# EAGLE board BPM7004 RetroCade Synth MegaWing-alt2 (EAGLE 5.11)
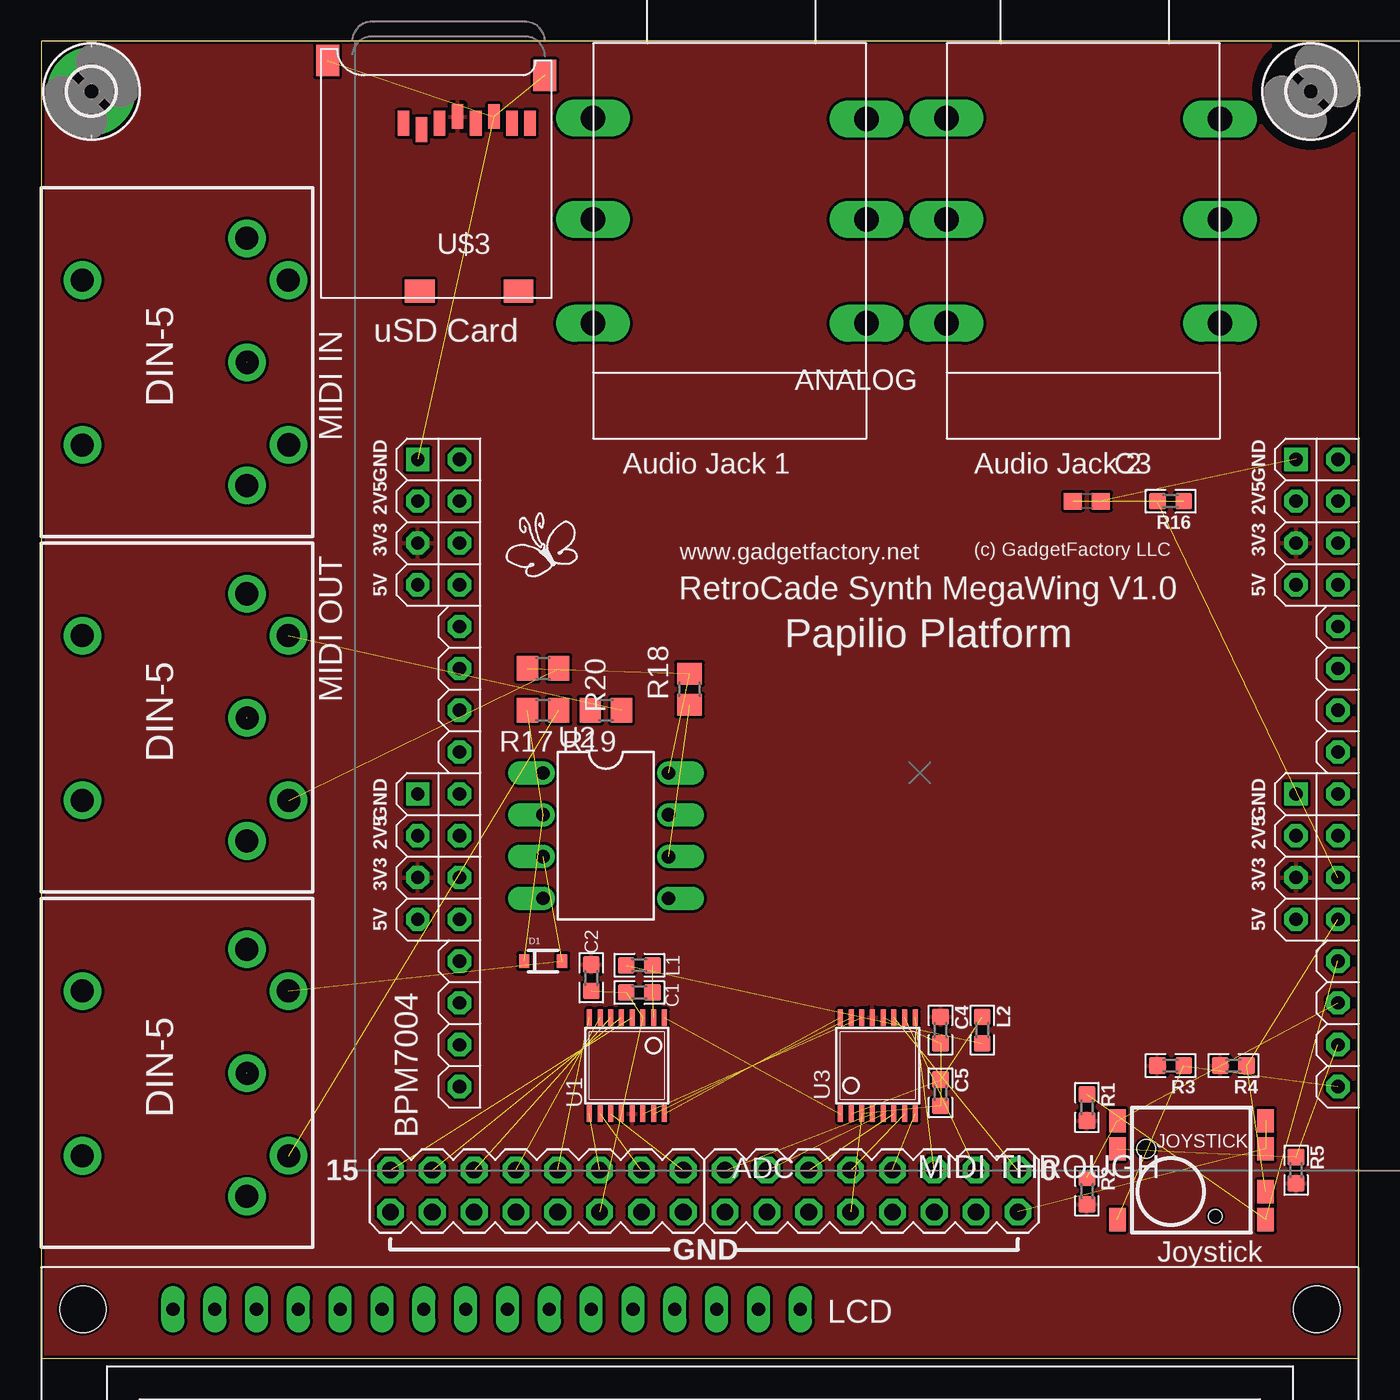
[diagram p0: board, top side]
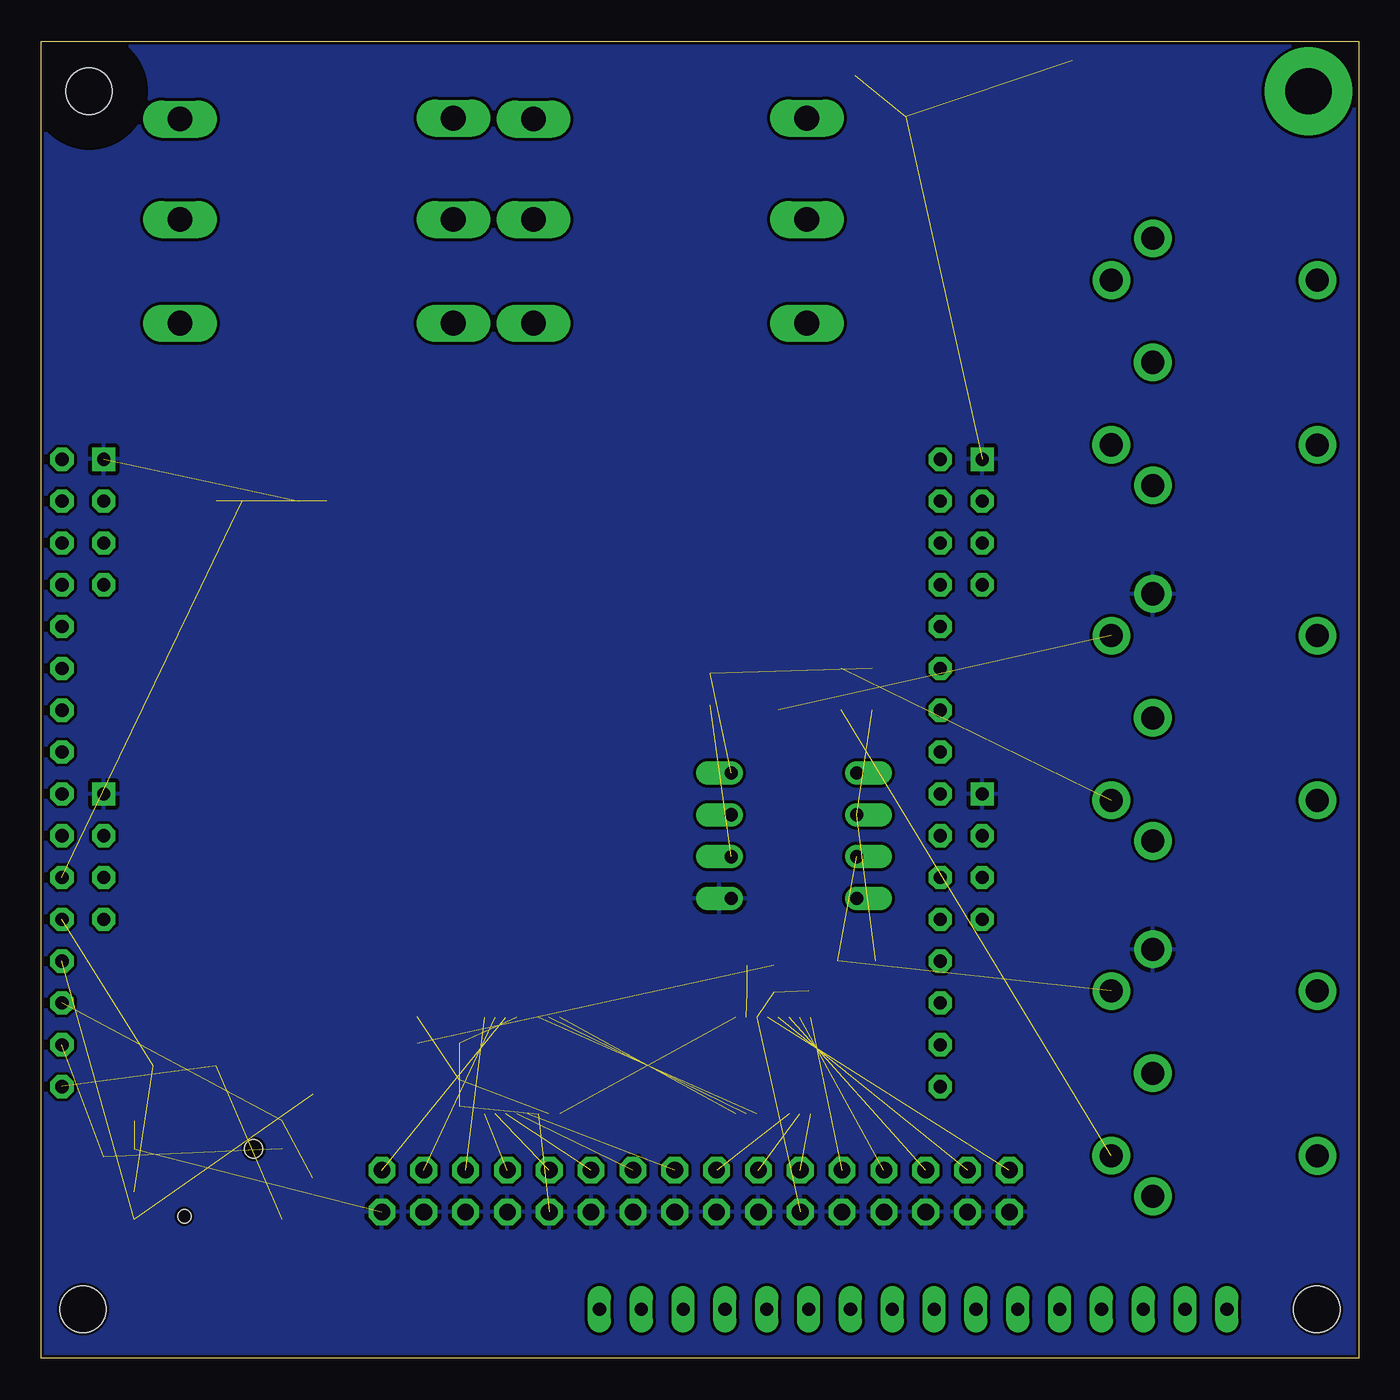
[diagram p1: board, bottom side, seen from below]

Size 80 x 80.01 mm. Coordinates in mm from the lower left corner, seen from the top.
Outline: 0,80.01 0,0 80,0 80,80.01 0,80.01
Copper layers (1*16): Top 0.035mm / dielectric 1.5mm / Bottom 0.035mm
Design rules "SparkFun_Derived_GoldePheonix_7mil *": minimum track width 7mil, minimum drill 15mil, track to track 7mil, track to pad 7mil, pad to pad 7mil, via to via 7mil, smd to smd 7mil, copper to edge 7mil, drill to drill 7mil, minimum pad ring 12mil, minimum via ring 10mil, stop-mask expansion 4mil, vias tented up to drill 18mil, thermal gap 10mil

## Footprints (pad centres in the part's own frame; a part is rotated, then mirrored left to right if it is on the bottom)
MA08-2 = drill 1.016 octagon: 1 -8.89,-1.27; 2 -8.89,1.27; 3 -6.35,-1.27; 4 -6.35,1.27; 5 -3.81,-1.27; 6 -3.81,1.27; 7 -1.27,-1.27; 8 -1.27,1.27; 9 1.27,-1.27; 10 1.27,1.27; 11 3.81,-1.27; 12 3.81,1.27; 13 6.35,-1.27; 14 6.35,1.27; 15 8.89,-1.27; 16 8.89,1.27
0603 = smd 1 x 1: 1 -0.8,0; 2 0.8,0
C0603 = smd 1.1 x 1: 1 -0.85,0; 2 0.85,0
SOD-323 = smd 0.63 x 0.83: 1 -1.15,0; 2 1.15,0
2,8-PAD = drill 2.8 pad 5.334 round: B2,8 0,0
2,8 = hole 2.8: 0,0
TPA-5POS = smd 1 x 1.4: 1 -4.5,-3; 2 -4.5,-1.3; 3 4.5,-1.3; 4 4.5,-3; 5 4.5,3; 6 -4.5,1.3; 7 -4.5,3 | hole 0.8: -1.45,2.8 | hole 1.1: 2.75,-1.3
DIN_5_FEMALE_SUPPORT = drill 1.4 pad 2.286 round: 1 0.46,3.61; 2 -7.07,3.6; 3 7.94,3.6; 4 -4.53,6.12; 5 5.47,6.13; 6 -4.53,-6.382; 7 5.478,-6.382
R0805 = smd 1.3 x 1.5: 1 -0.95,0; 2 0.95,0
TSSOP16 = smd 0.305 x 0.991: 1 -2.275,-2.918; 2 -1.625,-2.918; 3 -0.975,-2.918; 4 -0.325,-2.918; 5 0.325,-2.918; 6 0.975,-2.918; 7 1.625,-2.918; 8 2.275,-2.918; 9 2.275,2.918; 10 1.625,2.918; 11 0.975,2.918; 12 0.325,2.918; 13 -0.325,2.918; 14 -0.975,2.918; 15 -1.625,2.918; 16 -2.275,2.918
DIL08 = drill 0.813 offset: 1 -3.81,-3.81; 2 -1.27,-3.81; 3 1.27,-3.81; 4 3.81,-3.81; 5 3.81,3.81; 6 1.27,3.81; 7 -1.27,3.81; 8 -3.81,3.81
MICROSD = smd 0.7 x 1.5: 1 9,-10.64; 2 7.9,-10.24; 3 6.8,-10.64; 4 5.7,-11.04; 5 4.6,-10.64; 6 3.5,-11.04; 7 2.4,-10.64; 8 1.3,-10.64 | smd 1.8 x 1.4: CD1 2,-0.44; CD2 8,-0.44 | smd 1.4 x 1.9: MT1 0.4,-13.54; MT2 13.6,-14.44
NMJ6HFD2 = drill 1.5 long: GND-IN -8.4,19.45; GND-OUT 8.2,19.4; LEFT-IN -8.4,7; LEFT-OUT 8.2,7; RIGHT-IN -8.4,13.3; RIGHT-OUT 8.2,13.3
MEGAWING_HALF_NOHOLES_P1 = drill 0.8 octagon: A17 59.69,43.18; A18 59.69,40.64; A19 59.69,38.1; A20 59.69,35.56; A21 59.69,33.02; A22 59.69,30.48; A23 59.69,27.94; A24 59.69,25.4; A25 59.69,22.86; A26 59.69,20.32; A27 59.69,17.78; A28 59.69,15.24; A29 59.69,12.7; A30 59.69,10.16; A31 59.69,7.62; A32 59.69,5.08; A33 6.35,43.18; A34 6.35,40.64; A35 6.35,38.1; A36 6.35,35.56; A37 6.35,33.02; A38 6.35,30.48; A39 6.35,27.94; A40 6.35,25.4; A41 6.35,22.86; A42 6.35,20.32; A43 6.35,17.78; A44 6.35,15.24; A45 6.35,12.7; A46 6.35,10.16; A47 6.35,7.62; A48 6.35,5.08; W2_2V5 57.15,40.64; W2_2V5_3 57.15,20.32; W2_3V3 57.15,38.1; W2_3V3_3 57.15,17.78; W2_5V 57.15,35.56; W2_5V_3 57.15,15.24; W3_2V5 3.81,40.64; W3_2V5_2 3.81,20.32; W3_3V3 3.81,38.1; W3_3V3_2 3.81,17.78; W3_5V 3.81,35.56; W3_5V_2 3.81,15.24 | drill 0.8 square: W2_GND 57.15,43.18; W2_GND_3 57.15,22.86; W3_GND 3.81,43.18; W3_GND_2 3.81,22.86
LCD1602 = drill 0.8 long: 1 8,33.46; 2 10.54,33.46; 3 13.08,33.46; 4 15.62,33.46; 5 18.16,33.46; 6 20.7,33.46; 7 23.24,33.46; 8 25.78,33.46; 9 28.32,33.46; 10 30.86,33.46; 11 33.4,33.46; 12 35.94,33.46; 13 38.48,33.46; 14 41.02,33.46; 15 43.56,33.46; 16 46.1,33.46 | hole 2.8: 2.54,2.54; 2.54,33.46; 77.46,33.46; 77.46,2.54

## Placement (x,y rotation side)
ADC  [MA08-2]  30.1,10.16 180 top
ADC1  [MA08-2]  50.42,10.16 180 top
C1  .1uF  [0603]  36.32,22.23 180 top
C2  .1uF  [0603]  33.4,23.11 270 top
C3  4.7nF  [C0603]  63.5,52.07 0 top
C4  .1uF  [0603]  54.61,19.94 270 top
C5  .1uF  [0603]  54.61,16.13 270 top
D1  [SOD-323]  30.48,24.13 0 top
H1  MOUNT-PAD-ROUND2.8  [2,8-PAD]  3.05,76.96 0 top
H2  MOUNT-HOLE2.8  [2,8]  77.09,76.96 0 top
JOYSTICK  TPA-5POS  [TPA-5POS]  69.85,11.43 180 top
L1  FERRITEBEAD  [0603]  36.32,23.88 180 top
L2  FERRITEBEAD  [0603]  57.15,19.94 270 top
LOGO1  BUTTERFLY_LOGO  [BUTTERFLY_LOGO]  30.48,48.9 0 top
MID_OUT  MIDI_CONN_FEMALE_SUPPORT  [DIN_5_FEMALE_SUPPORT]  8.89,39.37 270 top
MID_THROUGH  MIDI_CONN_FEMALE_SUPPORT  [DIN_5_FEMALE_SUPPORT]  8.89,60.96 270 top
MIDI_IN  MIDI_CONN_FEMALE_SUPPORT  [DIN_5_FEMALE_SUPPORT]  8.89,17.78 270 top
R1  47K  [0603]  63.5,15.24 270 top
R2  47K  [0603]  63.5,10.16 270 top
R3  47K  [0603]  68.58,17.78 180 top
R4  47K  [0603]  72.39,17.78 180 top
R5  47K  [0603]  76.2,11.43 270 top
R16  3.3K  [0603]  68.58,52.07 180 top
R17  220  [R0805]  30.48,39.37 180 top
R18  220  [R0805]  39.37,40.64 90 top
R19  220  [R0805]  34.29,39.37 180 top
R20  220  [R0805]  30.48,41.91 180 top
U1  ADC088S102CIMT  [TSSOP16]  35.56,17.78 180 top
U2  6N138  [DIL08]  34.29,31.75 270 top
U3  ADC088S102CIMT  [TSSOP16]  50.8,17.78 0 top
U$3  MICROSD  [MICROSD]  30.99,64.39 180 top
U$8  NMJ6HFD2  [NMJ6HFD2]  41.91,55.88 0 top
U$9  NMJ6HFD2  [NMJ6HFD2]  63.37,55.88 0 top
U$10  MEGAWING_HALF_P1  [MEGAWING_HALF_NOHOLES_P1]  19.05,11.43 0 top
X1  HD44780LCD-1602  [LCD1602]  0,-30.48 0 top

## Library data of the parts
ADC ADC1 = con-lstb
C1 C2 C4 C5 L1 L2 R16 = GadgetFactory
C3 = resistor
D1 MID_OUT MID_THROUGH MIDI_IN = SparkFun
H1 H2 = holes
JOYSTICK = proxmark
LOGO1 = GadgetFactory_Pub
R1-R5 = GadgetFactory; DIGIKEY#: 311-390GRCT-ND
R17-R20 = rcl
U1 U3 = spiadc
U2 = optocoupler; MF: VISHAY/TELEFUNKEN; MPN: 6N138; OC_FARNELL: 9860150; OC_NEWARK: 35K5294
U$3 X1 = adafruit
U$8 U$9 = Neutrik
U$10 = Papilio

## Nets
3V3: C2.1 C4.1 R1.2 R2.2 R3.2 R4.2 R5.2 U1.13 U3.13 U$3.4 U$10.W2_3V3 U$10.W2_3V3_3 U$10.W3_3V3 U$10.W3_3V3_2
5V0: L1.2 L2.2
AUDIO: R16.2 U$10.A27
BLUE0: U$10.A19
BLUE1: U$10.A20
GND: ADC1.2 ADC1.4 ADC1.6 ADC1.8 ADC1.10 ADC1.12 ADC1.14 ADC1.16 ADC.2 ADC.4 ADC.6 ADC.8 ADC.10 ADC.12 ADC.14 ADC.16 C1.2 C2.2 C3.2 C4.2 C5.2 JOYSTICK.1 JOYSTICK.2 MID_OUT.2 MIDI_IN.2 U1.3 U1.12 U2.5 U3.3 U3.12 U$3.6 U$3.MT1 U$3.MT2 U$10.W2_GND U$10.W2_GND_3 U$10.W3_GND U$10.W3_GND_2
GREEN0: U$10.A21
GREEN1: U$10.A22
GREEN2: U$10.A23
HORIZONTAL_SYNC: U$10.A18
JOY_DOWN: JOYSTICK.4 R2.1 U$10.A30
JOY_LEFT: JOYSTICK.7 R1.1 U$10.A29
JOY_RIGHT: JOYSTICK.6 R4.1 U$10.A28
JOY_SELECT: JOYSTICK.5 R3.1 U$10.A32
JOY_UP: JOYSTICK.3 R5.1 U$10.A31
LED0: U$10.A41
LED1: U$10.A42
LED2: U$10.A43
LED3: U$10.A44
LED4: U$10.A45
LED5: U$10.A46
LED6: U$10.A47
LED7: U$10.A48
N$1: MIDI_IN.5 R17.1
N$2: D1.2 MIDI_IN.4 U2.3
N$3: D1.1 R17.2 U2.2
N$4: C3.1 R16.1
N$5: MID_OUT.4 R19.1
N$6: C5.1 L2.1 U3.2
N$7: MID_OUT.5 R20.1
N$8: ADC1.1 U3.11
N$9: ADC1.3 U3.10
N$10: ADC1.5 U3.9
N$11: ADC1.7 U3.8
N$12: ADC1.9 U3.7
N$13: ADC1.11 U3.6
N$14: ADC1.13 U3.5
N$15: ADC1.15 U3.4
N$37: C1.1 L1.1 U1.2
N$39: ADC.1 U1.11
N$40: ADC.3 U1.10
N$41: ADC.5 U1.9
N$42: ADC.7 U1.8
N$43: ADC.9 U1.7
N$44: ADC.11 U1.6
N$45: ADC.13 U1.5
N$46: ADC.15 U1.4
RED0: U$10.A24
RED1: U$10.A25
RED2: U$10.A26
RX: R18.1 U2.6
SD_!CS: U$3.2
SD_DI: U$3.3
SD_DO: U$3.7
SD_SCK: U$3.5
SPI_CS: U1.1 U3.1
SPI_DIN: U1.14 U3.14
SPI_DOUT: U1.15 U3.15
SPI_SCLK: U1.16 U3.16
SW0: U$10.A33
SW1: U$10.A34
SW2: U$10.A35
SW3: U$10.A36
SW4: U$10.A37
SW5: U$10.A38
SW6: U$10.A39
SW7: U$10.A40
TX: R19.2
VCC: R18.2 R20.2 U2.8
VERTICAL_SYNC: U$10.A17

## Tracks (layer width: path | path; a pad name or v marks a point on that pad's centre or on a via)
3V3
  pour Top: 0,80.01 0,0 80.01,0 80.01,80.01
5V0  (1 unrouted)
AUDIO  (1 unrouted)
GND  (14 unrouted)
  pour Bottom: 0,80.01 0,0 80.01,0 80.01,80.01
JOY_DOWN  (2 unrouted)
JOY_LEFT  (2 unrouted)
JOY_RIGHT  (2 unrouted)
JOY_SELECT  (2 unrouted)
JOY_UP  (2 unrouted)
N$1  (1 unrouted)
N$2  (2 unrouted)
N$3  (2 unrouted)
N$4  (1 unrouted)
N$5  (1 unrouted)
N$6  (2 unrouted)
N$7  (1 unrouted)
N$8  (1 unrouted)
N$9  (1 unrouted)
N$10  (1 unrouted)
N$11  (1 unrouted)
N$12  (1 unrouted)
N$13  (1 unrouted)
N$14  (1 unrouted)
N$15  (1 unrouted)
N$37  (2 unrouted)
N$39  (1 unrouted)
N$40  (1 unrouted)
N$41  (1 unrouted)
N$42  (1 unrouted)
N$43  (1 unrouted)
N$44  (1 unrouted)
N$45  (1 unrouted)
N$46  (1 unrouted)
RX  (1 unrouted)
SPI_CS  (1 unrouted)
SPI_DIN  (1 unrouted)
SPI_DOUT  (1 unrouted)
SPI_SCLK  (1 unrouted)
VCC  (2 unrouted)

## Text on the board
tPlace: uSD Card | ANALOG | MIDI IN | Audio Jack 1 | Audio Jack 2 | www.gadgetfactory.net | (c) GadgetFactory LLC | RetroCade Synth MegaWing V1.0 | Papilio Platform | MIDI OUT | BPM7004 | 15 | MIDI THROUGH | 0 | Joystick | GND | LCD